# EAGLE board template_S_01 (EAGLE 7.2.0)

Size 28.57 x 47.62 mm. Coordinates in mm from the lower left corner, seen from the top.
Outline: 0,43.18 0,4.45 arc90 4.45,0 24.13,0 arc90 28.57,4.45 28.57,43.18 arc90 24.13,47.62 4.45,47.62 arc90 0,43.18
Copper layers (1*16): Top 0.035mm / dielectric 1.5mm / Bottom 0.035mm
Design rules "Othermill-DRC-1-100": minimum track width 8mil, minimum drill 0.8mm, track to track 0.256540625mm, track to pad 0.256540625mm, pad to pad 0.256540625mm, via to via 0.256540625mm, smd to smd 0mil, copper to edge 0mil, drill to drill 1mil, minimum pad ring 10mil, minimum via ring 10mil, stop-mask expansion 1mil, vias tented up to drill 30mil, thermal gap 10mil

## Footprints (pad centres in the part's own frame; a part is rotated, then mirrored left to right if it is on the bottom)
OTHERSNAP-HOLES = drill 1.778 pad 3.81: GND 0,-5.08; SIGNAL 0,0; VCC 0,5.08

## Placement (x,y rotation side)
U$1  OTHERSNAP-OUTHOLES_ONLY  [OTHERSNAP-HOLES]  25.4,23.88 0 top
U$2  OTHERSNAP-INHOLES_ONLY  [OTHERSNAP-HOLES]  4.45,23.88 0 top

## Library data of the parts
U$1 U$2 = mentor2

## Nets
+5V: U$1.VCC U$2.VCC
GND: U$1.GND U$2.GND

## Tracks (layer width: path | path; a pad name or v marks a point on that pad's centre or on a via)
+5V  (1 unrouted)
GND  (1 unrouted)